# Altium PCB MCH_CLKB_PCB.PcbDoc (part 2 of 5)
Units mil, origin at the board's own origin, x right, y up, seen from the top; angles counter-clockwise.
Board outline 7110.67 x 2894.12 mil, 6 copper layers (Top Layer, GND, MidLayer1, MidLayer2, InternalPlane1, Bottom Layer), stack 61.549 mil thick; 421 components, 433 nets, 2112 pads, 1311 vias.
Unrouted connection lines stored in the file: 39.
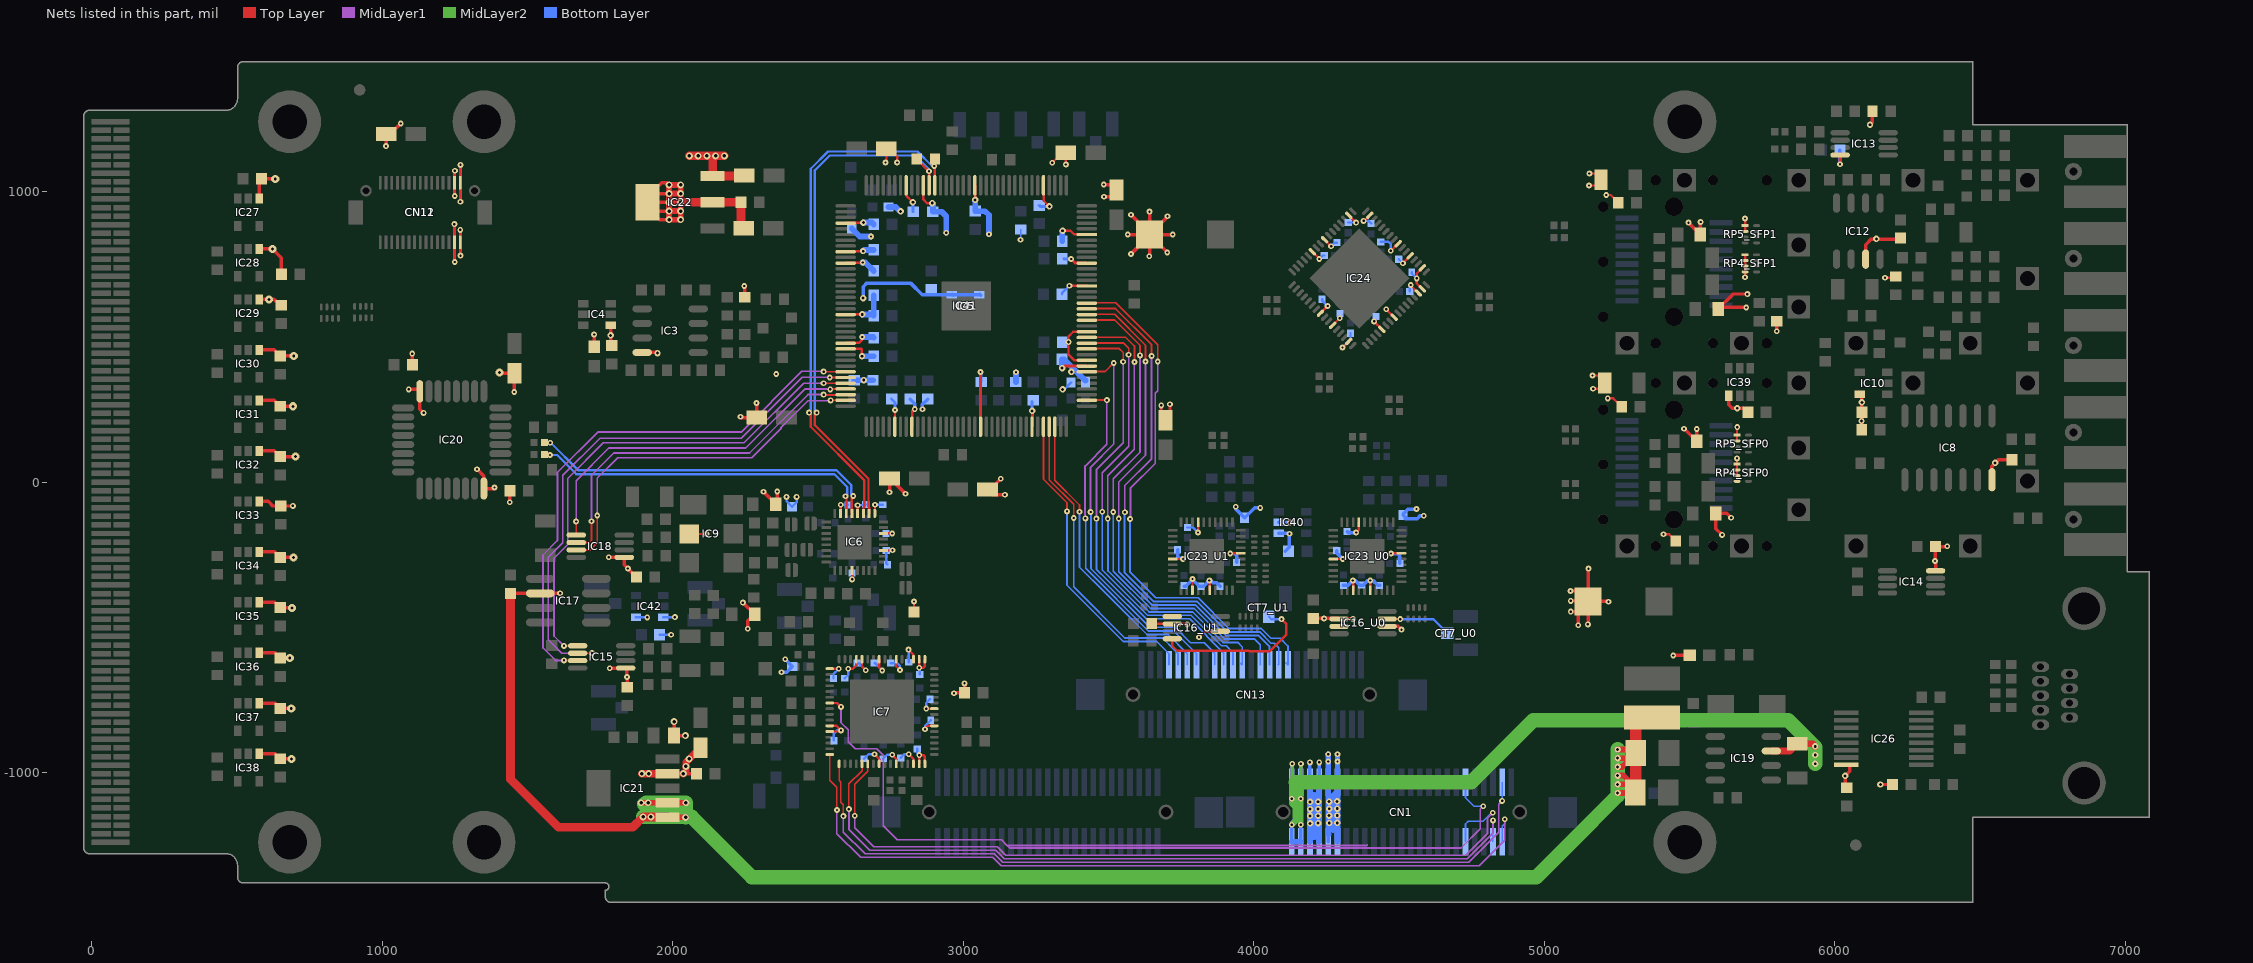
[diagram p6: the nets of this part, all layers, seen from the top]

## Footprints (in the part's own frame and the unit in brackets; to place one, negate y for a bottom-side part, rotate by r counter-clockwise, add the part's x,y. Pads: shape width x height; smd on the part's side, far side on the other; paste and mask are expansions set on the pad) (continued)
SOT-23 [mm] "SOT-23; 3 Leads; Body 3.0 x 2.6 mm, inc. leads (LxW max)"
  rect 0.9x0.95 smd: 1(-0.95,-1.25) 2(0.95,-1.25) 3(0,1.25)
  silkscreen extent -2.07,-1.38 1.3,1.25
SSOP16 [mm] "SSOP; 16 Leads; Body Width 5.3 mm; Pitch 0.65 mm"
  rect 0.4x2.15 smd: 1(-2.275,-3.275) 2(-1.625,-3.275) 3(-0.975,-3.275) 4(-0.325,-3.275) 5(0.325,-3.275) 6(0.975,-3.275) 7(1.625,-3.275) 8(2.275,-3.275) 9(2.275,3.275) 10(1.625,3.275) 11(0.975,3.275) 12(0.325,3.275) 13(-0.325,3.275) 14(-0.975,3.275) 15(-1.625,3.275) 16(-2.275,3.275)
  silkscreen extent -3.25,-3.4 3.25,1.8
TSOP65P490-8AN [mm] "TSOP, 8-Leads, Body 3x3mm, Pitch 0.65mm, IPC Medium Density"
  oval 1.7x0.45 smd: 1(-2.1,0.975) 2(-2.1,0.325) 3(-2.1,-0.325) 4(-2.1,-0.975) 5(2.1,-0.975) 6(2.1,-0.325) 7(2.1,0.325) 8(2.1,0.975)
  silkscreen extent -2.22,-1.55 0.85,1.87, body extent -1.6,-1.6 1.6,1.6, height 1.1
UTCA_MCH_TONGUE2_3_4 [mm] "uTCA MTCA.0 MCH tongue connector"
  rect 3.3x0.48 smd paste-1000: 1(2.35,-31.5) 7(2.35,-27) 10(2.35,-24.75) 13(2.35,-22.5) 16(2.35,-20.25) 19(2.35,-18) 22(2.35,-15.75) 25(2.35,-13.5) 28(2.35,-11.25) 31(2.35,-9) 34(2.35,-6.75) 37(2.35,-4.5) 40(2.35,-2.25) 43(2.35,0) 46(2.35,2.25) 49(2.35,4.5) 52(2.35,6.75) 55(2.35,9) 58(2.35,11.25) 61(2.35,13.5) 64(2.35,15.75) 67(2.35,18) 70(2.35,20.25) 73(2.35,22.5) 76(2.35,24.75) 79(2.35,27) 82(2.35,29.25) 85(2.35,31.5)
  rect 1.4x0.48 smd paste-1000: 2(3.3,-30.75) 3(3.3,-30) 4(3.3,-29.25) 5(3.3,-28.5) 6(3.3,-27.75) 8(3.3,-26.25) 9(3.3,-25.5) 11(3.3,-24) 12(3.3,-23.25) 14(3.3,-21.75) 15(3.3,-21) 17(3.3,-19.5) 18(3.3,-18.75) 20(3.3,-17.25) 21(3.3,-16.5) 23(3.3,-15) 24(3.3,-14.25) 26(3.3,-12.75) 27(3.3,-12) 29(3.3,-10.5) 30(3.3,-9.75) 32(3.3,-8.25) 33(3.3,-7.5) 35(3.3,-6) 36(3.3,-5.25) 38(3.3,-3.75) 39(3.3,-3) 41(3.3,-1.5) 42(3.3,-0.75) 44(3.3,0.75) 45(3.3,1.5) 47(3.3,3) 48(3.3,3.75) 50(3.3,5.25) 51(3.3,6) 53(3.3,7.5) 54(3.3,8.25) 56(3.3,9.75) 57(3.3,10.5) 59(3.3,12) 60(3.3,12.75) 62(3.3,14.25) 63(3.3,15) 65(3.3,16.5) 66(3.3,17.25) 68(3.3,18.75) 69(3.3,19.5) 71(3.3,21) 72(3.3,21.75) 74(3.3,23.25) 75(3.3,24) 77(3.3,25.5) 78(3.3,26.25) 80(3.3,27.75) 81(3.3,28.5) 83(3.3,30) 84(3.3,30.75)
  rect 1.7x0.48 smd paste-1000: 3mate(1.55,-30.75) 3mate(1.55,-30) 3mate(1.55,-29.25) 3mate(1.55,-28.5) 3mate(1.55,-27.75) 3mate(1.55,-26.25) 3mate(1.55,-25.5) 3mate(1.55,-24) 3mate(1.55,-23.25) 3mate(1.55,-21.75) 3mate(1.55,-21) 3mate(1.55,-19.5) 3mate(1.55,-18.75) 3mate(1.55,-17.25) 3mate(1.55,-16.5) 3mate(1.55,-15) 3mate(1.55,-14.25) 3mate(1.55,-12.75) 3mate(1.55,-12) 3mate(1.55,-10.5) 3mate(1.55,-9.75) 3mate(1.55,-8.25) 3mate(1.55,-7.5) 3mate(1.55,-6) 3mate(1.55,-5.25) 3mate(1.55,-3.75) 3mate(1.55,-3) 3mate(1.55,-1.5) 3mate(1.55,-0.75) 3mate(1.55,0.75) 3mate(1.55,1.5) 3mate(1.55,3) 3mate(1.55,3.75) 3mate(1.55,5.25) 3mate(1.55,6) 3mate(1.55,7.5) 3mate(1.55,8.25) 3mate(1.55,9.75) 3mate(1.55,10.5) 3mate(1.55,12) 3mate(1.55,12.75) 3mate(1.55,14.25) 3mate(1.55,15) 3mate(1.55,16.5) 3mate(1.55,17.25) 3mate(1.55,18.75) 3mate(1.55,19.5) 3mate(1.55,21) 3mate(1.55,21.75) 3mate(1.55,23.25) 3mate(1.55,24) 3mate(1.55,25.5) 3mate(1.55,26.25) 3mate(1.55,27.75) 3mate(1.55,28.5) 3mate(1.55,30) 3mate(1.55,30.75)
  rect 1.7x0.48 smd far side paste-1000: 3mate(1.55,-30.75) 3mate(1.55,-30) 3mate(1.55,-29.25) 3mate(1.55,-28.5) 3mate(1.55,-27.75) 3mate(1.55,-26.25) 3mate(1.55,-25.5) 3mate(1.55,-24) 3mate(1.55,-23.25) 3mate(1.55,-21.75) 3mate(1.55,-21) 3mate(1.55,-19.5) 3mate(1.55,-18.75) 3mate(1.55,-17.25) 3mate(1.55,-16.5) 3mate(1.55,-15) 3mate(1.55,-14.25) 3mate(1.55,-12.75) 3mate(1.55,-12) 3mate(1.55,-10.5) 3mate(1.55,-9.75) 3mate(1.55,-8.25) 3mate(1.55,-7.5) 3mate(1.55,-6) 3mate(1.55,-5.25) 3mate(1.55,-3.75) 3mate(1.55,-3) 3mate(1.55,-1.5) 3mate(1.55,-0.75) 3mate(1.55,0.75) 3mate(1.55,1.5) 3mate(1.55,3) 3mate(1.55,3.75) 3mate(1.55,5.25) 3mate(1.55,6) 3mate(1.55,7.5) 3mate(1.55,8.25) 3mate(1.55,9.75) 3mate(1.55,10.5) 3mate(1.55,12) 3mate(1.55,12.75) 3mate(1.55,14.25) 3mate(1.55,15) 3mate(1.55,16.5) 3mate(1.55,17.25) 3mate(1.55,18.75) 3mate(1.55,19.5) 3mate(1.55,21) 3mate(1.55,21.75) 3mate(1.55,23.25) 3mate(1.55,24) 3mate(1.55,25.5) 3mate(1.55,26.25) 3mate(1.55,27.75) 3mate(1.55,28.5) 3mate(1.55,30) 3mate(1.55,30.75)
  rect 3.3x0.48 smd far side paste-1000: 86(2.35,31.5) 89(2.35,29.25) 92(2.35,27) 95(2.35,24.75) 98(2.35,22.5) 101(2.35,20.25) 104(2.35,18) 107(2.35,15.75) 110(2.35,13.5) 113(2.35,11.25) 116(2.35,9) 119(2.35,6.75) 122(2.35,4.5) 125(2.35,2.25) 128(2.35,0) 131(2.35,-2.25) 134(2.35,-4.5) 137(2.35,-6.75) 140(2.35,-9) 143(2.35,-11.25) 146(2.35,-13.5) 149(2.35,-15.75) 152(2.35,-18) 155(2.35,-20.25) 158(2.35,-22.5) 161(2.35,-24.75) 164(2.35,-27) 170(2.35,-31.5)
  rect 1.4x0.48 smd far side paste-1000: 87(3.3,30.75) 88(3.3,30) 90(3.3,28.5) 91(3.3,27.75) 93(3.3,26.25) 94(3.3,25.5) 96(3.3,24) 97(3.3,23.25) 99(3.3,21.75) 100(3.3,21) 102(3.3,19.5) 103(3.3,18.75) 105(3.3,17.25) 106(3.3,16.5) 108(3.3,15) 109(3.3,14.25) 111(3.3,12.75) 112(3.3,12) 114(3.3,10.5) 115(3.3,9.75) 117(3.3,8.25) 118(3.3,7.5) 120(3.3,6) 121(3.3,5.25) 123(3.3,3.75) 124(3.3,3) 126(3.3,1.5) 127(3.3,0.75) 129(3.3,-0.75) 130(3.3,-1.5) 132(3.3,-3) 133(3.3,-3.75) 135(3.3,-5.25) 136(3.3,-6) 138(3.3,-7.5) 139(3.3,-8.25) 141(3.3,-9.75) 142(3.3,-10.5) 144(3.3,-12) 145(3.3,-12.75) 147(3.3,-14.25) 148(3.3,-15) 150(3.3,-16.5) 151(3.3,-17.25) 153(3.3,-18.75) 154(3.3,-19.5) 156(3.3,-21) 157(3.3,-21.75) 159(3.3,-23.25) 160(3.3,-24) 162(3.3,-25.5) 163(3.3,-26.25) 165(3.3,-27.75) 166(3.3,-28.5) 167(3.3,-29.25) 168(3.3,-30) 169(3.3,-30.75)
  rect 1.4x0.48 on Bottom Solder paste-1000: 138(3.3,-7.5)
VCTCXO_VM53S [mm]
  rect 1.2x1.2 smd: 1(-0.6,0.6) 2(3.6,0.6) 3(3.6,3.2) 4(-0.6,3.2)
  silkscreen extent -1.6,-0.4 4.6,4.2
vs-705 [mm]
  rect 1.68x2.34 smd: 1(-0.025,1.168)
  rect 1.68x1.7 smd: 2(2.54,0.838) 3(5.055,0.838) 4(5.055,4.674) 5(2.515,4.674) 6(-0.025,4.674)
  silkscreen extent -1.65,0.46 6.71,4.98
YC124 [mm]
  rect 0.6x0.25 smd: 1(-0.5,0.75)
  oval 0.6x0.25 smd: 2(-0.5,0.25) 3(-0.5,-0.25) 4(-0.5,-0.75) 5(0.5,-0.75) 6(0.5,-0.25) 7(0.5,0.25) 8(0.5,0.75)
  silkscreen extent -0.75,-1 0.75,1

## Part data
C1 C2: library part CC0402_22NF_16V_10%_X7R, "Non-polarised capacitor"
C3 C4 C13 C15 C16 C17 C23 C24 C25 C27 C28 C29 C31 C32 C33 C34 C35 C36 C56 C58 C64 C65 C70 C72 C73 C74 C76 C81 C84 C86 C87 C90 C98 C99 C100 C103 C118_SFP0 C118_SFP1 C121_SFP0 C121_SFP1 C123_SFP0 C123_SFP1 C124 C129_U0 C129_U1 C134_U0 C134_U1 C136 C137 C138 C139 C140 C141 C142 C143 C144 C145 C146 C148 C149 C150 C151 C152 C153 C154 C155 C156 C157 C164 C167: library part CC0603_100NF_50V_10%_X7R, "Non-polarised capacitor"
C7 C8 C9 C10 C11 C12: library part Cap, "Capacitor"
C14 C18 C26 C30 C37 C38 C39 C40 C46 C85 C94 C96 C107 C108 C110 C112 C126 C135_U0 C135_U1: library part CC0603_10NF_50V_10%_X7R, "Non-polarised capacitor"
C19 C20 C21 C22 C57 C71 C109 C111 C113 C115 C147 C168: library part CTE3216-18_22UF_10V_10%, "Polarised capacitor"
C41 C42 C43 C44 C45 C47 C49 C50 C52 C53 C54 C59 C61 C63 C66 C67 C68 C69 C77 C79 C80 C83 C92 C104 C105 C128_U0 C128_U1 C132_U0 C132_U1 C133_U0 C133_U1 C158_U0 C158_U1 C163_U0 C163_U1 C165 C166 C178 C188 C189 C190 C191 C192 C193 C194 C195 C196 C197 C200 C201 C202: library part CC0402_100NF_16V_10%_X7R, "Non-polarised capacitor"
C48 C51 C88 C95 C97 C102: library part CC0603_10UF_6.3V_20%_X5R, "Non-polarised capacitor"
C55 C75 C91 C93 C101 C117_SFP0 C117_SFP1 C120_SFP0 C120_SFP1 C122_SFP0 C122_SFP1: library part CC1206_10UF_10V_10%_X7R, "Non-polarised capacitor"
C60 C62 C78 C82: library part CC0603_47NF_25V_10%_X7R, "Non-polarised capacitor"
C89: library part CC0402_1NF_50V_10%_X7R, "Non-polarised capacitor"
C106: library part CC0805_2.2UF_16V_10%_X7R, "Non-polarised capacitor"
C116: library part CC1206_10UF_16V_10%_X7R, "Non-polarised capacitor"
C119 C125: library part CTE3528-21_47UF_6.3V_10%_LESR0250, "Polarised capacitor"
C127: library part CC0603_68PF_50V_5%_NP0, "Non-polarised capacitor"
C130_U0 C130_U1 C131_U0 C131_U1 C159_U0 C159_U1 C169 C170 C171 C172 C173 C174 C175 C176 C177 C179 C180 C181 C182 C183 C184 C185 C186 C187: library part CC0402_10NF_16V_10%_X7R, "Non-polarised capacitor"
C160 C162: library part CC0603_220NF_16V_+80%-20%_Y5V, "Non-polarised capacitor"
C161: library part CC0603_33PF_50V_5%_NP0, "Non-polarised capacitor"
C198 C199: library part CTE7343-43_220UF_10V_10%_LESR0050, "Polarised capacitor"
CN1 CN3 CN13: library part KX14_50p, "multipin B2B connector (plug)"
CN2 CN4 CN5 CN6 CN7: library part SMA_SOCKET, "SMB piggyboard connection"
CN8_SFP0 CN8_SFP1: library part SFP_SOCKET_SINGLE, "Socket for SFP module"
CN9: library part CON_DB9_H, "Receptacle Assembly, 9 Position, Right Angle"
CN10: "microTCA MTCA.0 standard MCH connector 3"
CN11: library part KX14_30p, "multipin B2B connector (plug)"
CN12: library part KX15_30p, "multipin B2B connector (plug)"
CT1 CT2 CT3 CT4 CT5 CT6 CT7_U0 CT7_U1 CT8 CT9 CT10: library part CON_TESTPOINT_UFL, "UFL connector testpoint"
D2: library part BAV99, "Silicon Switching Diode Array for High-Speed Switching"
D3 D4: "Silicon Switching Diode Array for High-Speed Switching"
D5: "Red chip LED"
D6: library part "D Schottky", "Schottky Diode"
IC3: library part AD8052, "Low Cost, High-Speed Rail-to-Rail Amplifier"
IC4: library part ADS7886, "TI 1 MSPS serial ADC"
IC5: "Cyclone III Family FPGA, 94 I/O Pins, 4 PLLs, 144-Pin EQFP, Speed Grade 7, Commercial Grade"
IC6: "PLL generator with 1:4 fanout"
IC7: "PLL with clock fanout"
IC8: "Quad Buffer with 3-State Outputs with TTL Compatible Inputs"
IC9: library part VCXO_CFPV_45, "VCXO oscillator"
IC10: "Analog Devices fast comparator"
IC11: library part VCTCXO_VM53S, "VCTCXO oscillator"
IC12: "Analog Devices general purpose low-voltage R2R CMOS opamp"
IC13: "ONSemi differental receiver w/ECL output"
IC14: "ONSemi LVDS/LVPECL -> LVTTL/LVCMOS buffer"
IC15 IC18: library part AD5662, "Analog Devices 16-bit DAC w/SPI interface, ext ref"
IC16_U0 IC16_U1: "1:4 LVTTL fanout"
IC17: "2.5V/3.0V High-Precision Reference"
IC19: "Step-down switchmode converter"
IC20: "TI LVDS 1:10 fanout"
IC21: library part TPS786xx, "TI low noise LDO, 1A load"
IC22: library part 1117, "Three-Terminal Adjustable Output Positive Voltage Regulator"
IC23_U0 IC23_U1: "Texas Instruments Gigabit Ethernet PHY with deterministic clocking and LVPECL output interface"
IC24: "Gigabit 8x8 crosspoint switch"
IC26: library part IFC_MAX3232
IC27 IC29 IC31 IC33 IC35 IC37: "TTL->LVDS buffer"
IC28 IC30 IC32 IC34 IC36 IC38: "LVDS->TTL buffer"
IC39 IC40 IC41 IC42: "I2C temp. sensor"
L1 L2 L3 L4 L5 L6 L7 L11 L12 L13 L14 L15: library part Inductor
L8_SFP0 L8_SFP1 L9_SFP0 L9_SFP1 L10_U0 L10_U1: "Ferrite bead"
L16: library part L_WUERTH_744043, "Wuerth small footprint SMD power inductor"
R1 R2 R32 R46 R53_U0 R53_U1 R54_U0 R54_U1: library part R0603_49R9_0.1%_0.063W_10PPM, "Resistor - 0.1%"
R3 R17 R20 R21 R48 R51 R59 R70_SFP0 R70_SFP1 R71_SFP0 R71_SFP1 R95: library part R0603_0R_JUMPER, "Resistor - 1%"
R8 R9 R10 R11 R12 R13 R14: library part Res2, "Resistor"
R15 R16 R23 R24 R28 R29 R37 R38 R62: library part R0603_10K_1%_0.1W_100PPM, "Resistor - 1%"
R18 R19 R33 R34 R41 R42 R47 R49 R55 R73 R74 R75 R76 R77 R78: library part R0603_100R_1%_0.1W_100PPM, "Resistor - 1%"
R22 R35 R36 R43 R57 R58 R65: library part R0603_22R_1%_0.1W_100PPM, "Resistor - 1%"
R25 R27: library part R0603_2K2_1%_0.1W_100PPM, "Resistor - 1%"
R26: library part R0603_33R_1%_0.1W_100PPM, "Resistor - 1%"
R30 R31 R40 R45 R52: library part R0603_470R_1%_0.1W_100PPM, "Resistor - 1%"
R39: library part R0603_100K_1%_0.1W_100PPM, "Resistor - 1%"
R44: library part R0603_100R_0.1%_0.063W_10PPM, "Resistor - 0.1%"
R50: library part R0603_5K1_1%_0.1W_100PPM, "Resistor - 1%"
R56: library part R0603_270R_1%_0.1W_100PPM, "Resistor - 1%"
R60 R61 R83 R84: library part R0603_200R_0.1%_0.063W_10PPM, "Resistor - 0.1%"
R63: library part R0603_4K12_0.1%_0.063W_10PPM, "Resistor - 0.1%"
R64: library part R0603_3K24_0.1%_0.063W_10PPM, "Resistor - 0.1%"
R66: library part R0603_820R_1%_0.1W_100PPM, "Resistor - 1%"
R67: library part R0603_390R_1%_0.1W_100PPM, "Resistor - 1%"
R69 R72 R79 R80 R81 R82 R85 R86 R87 R88 R89 R90 R91 R92 R93 R94 R96 R97: library part R0402_0R_JUMPER, "Resistor - 1%"
RP1_U0 RP1_U1 RP2_U0 RP2_U1 RP3_U0 RP3_U1 RP6 RP7: library part Res_Pack4_22R_YC124, "4-resistor pack"
RP4_SFP0 RP4_SFP1 RP5_SFP0 RP5_SFP1: library part Res_Pack4_10k_YC124, "4-resistor pack"
SJ1 SJ2 SJ3 SJ4 SJ7: library part SOLDER_JOINT_NORM_OPEN
SJ5 SJ6: library part SOLDER_JOINT_NORM_CLOSED

## Free pads (board coordinates)
  round 39.37 smd paste-39.37 mask+19.68: fid_1(922.5,1350) fid_1(6072.5,-1250)
  round 39.37 smd far side paste-39.37 mask+19.68: fid_4(922.5,1350) fid_4(6072.5,-1250)
  round 216.54 hole 118.11: ""(681.16,-1240.16) ""(681.16,1240.16) ""(1350.45,-1240.16) ""(1350.45,1240.16) ""(5484.31,-1240.16) ""(5484.31,1240.16)

## Via types
v1: diameter 20, hole 8, Top Layer to Bottom Layer, tented both sides, 842 vias
v2: diameter 22, hole 10, Top Layer to Bottom Layer, tented both sides, 199 vias
v3: diameter 24, hole 12, Top Layer to Bottom Layer, tented both sides, 163 vias
v4: diameter 25.98, hole 12.99, Top Layer to Bottom Layer, tented both sides, 58 vias
v5: diameter 20, hole 10, Top Layer to Bottom Layer, tented both sides, 18 vias
v6: diameter 20, hole 10, Top Layer to Bottom Layer, 16 vias
v7: diameter 28, hole 10, Top Layer to Bottom Layer, tented both sides, 15 vias

## Nets (pads, with @x,y where several pads share a name; then routed paths per layer and width w, separated by ;. In a path a pad name is that pad's centre, name@x,y a point inside that pad or via, vN(x,y) a via of type N, cw(c..) or ccw(c..) an arc to the next point about the centre after c; other vN are vias at no path point)
+1V2: C13.1 C14.2 C17.1 C18.2 C25.1 C26.2 C29.1 C30.2 C57.1 C71.1 C112.2 C113.1 C115.1 IC5.5 IC5.29 IC5.45 IC5.61 IC5.78 IC5.102 IC5.116 IC5.134 IC22.2 IC22.4 L3.1 L4.1 | length 2660.9
  Top Layer w8: IC5.61@2596.15,479.05 2641.55,479.05 2651.5,489 v1@2651.5,499 ; IC5.45@2596.15,794.01 2654.51,794.01 v1(2655.5,795) ; v1(2732.5,1100) 2735.68,1103.18 C115.1@2735.68,1147 ; C115.1@2745.5,1147 2772.5,1120 v1(2772.5,1100) ; IC5.78@2765.44,191.65 2765.44,236 v1(2765.44,248.06) ; IC5.29@2804.81,1022.35 2804.81,984.69 v2(2826.5,963) ; IC5.5@3277.25,1022.35 3277.25,968.25 v2(3296.5,949) ; v1(3306.5,1099) 3341.5,1134 C57.1@3353.32,1134 3353.32,1093.18 v1(3353.5,1093)
  Top Layer w10: v2(3237.5,245) 3237.88,244.62 IC5.102@3237.88,191.65 ; v2(3340.5,392) 3347.81,399.31 IC5.116@3425.85,399.31 ; v1(3371.5,768) 3385.86,753.64 IC5.134@3425.85,753.64
  Top Layer w12: IC22.4@1913.3,939.2 IC22.4@1913.3,963 ; v3(1987.5,903) 1962.5,903 1955.5,903 1913.3,945.2 IC22.4@1913.3,963 ; v3(1987.5,933) 1943.3,933 IC22.4@1913.3,963 ; v3(1987.5,963) IC22.4@1913.3,963 ; v3(1987.5,993) 1943.3,993 IC22.4@1913.3,963 ; v3(1987.5,1023) 1980.5,1030 1962.5,1030 1913.3,980.8 IC22.4@1913.3,963 ; v1(3483.5,1024) 3508.68,1024 C113.1@3527.5,1005.18 3504.32,982 v1(3484.5,982)
  Top Layer w20: v3(1987.5,933) 2024.5,933 v3@2027.5,930 ; v3(1987.5,963) v3@2024.5,963 ; v3(1987.5,993) 2024.5,993 v3@2027.5,990 ; v3@2027.5,960 v3@2024.5,963 ; IC22.2@2137.7,963 v3@2024.5,963 ; v2(3372.42,379.28) v2@3373.15,379.28 ; v3(1987.5,903) v3(1987.5,1023) v3(2027.5,1023) v3(2027.5,903) v3(1987.5,903)
  Top Layer w30: v3@2024.5,963 IC22.2@2137.7,963 C112.2@2235,963 2235,883.32 C71.1@2244.32,874
  Bottom Layer w10: C13.1@2753.5,285.5 2765.44,273.57 v1(2765.44,248.06) ; v2(2826.5,963) 2827.5,962 C14.2@2827.5,930.5 ; v2(3237.5,245) C17.1@3237.5,277.5 ; C26.2@3261.5,952.5 3265,949 v2(3296.5,949) ; C18.2@3346.5,769 3347.5,768 v1(3371.5,768)
  Bottom Layer w20: v1@2651.5,499 2690,499 C30.2@2692,497 ; v1(2655.5,795) 2659.5,799 C25.1@2692,799 ; L3.1@2743.06,947 2767.5,947 2782.5,932 v2(2784.5,932) ; v2(3340.5,392) 3340,392.5 C29.1@3340,422 3348.15,422 3377.33,392.83 ; v2(3372.42,379.28) 3377.33,384.18 3377.33,392.83 ; L4.1@3420.5,349.65 3377.33,392.83
  other v1: 2652.5,499
  other v3: 2027.5,933 2027.5,963 2027.5,993
+2V5: C15.1 C19.1 C20.1 C23.1 C27.1 C31.1 C33.1 C35.1 C36.1 C128_U0.2 C128_U1.2 C129_U0.2 C129_U1.2 C130_U0.2 C130_U1.2 C131_U0.2 C131_U1.2 C132_U0.2 C132_U1.2 C133_U0.2 C133_U1.2 C145.1 C146.1 C147.1 C158_U0.2 C158_U1.2 C198.1 CN1.9 CN1.10 CN1.11 CN1.12 IC5.17 IC5.26 IC5.40 IC5.47 IC5.93 IC5.117 IC5.122 IC5.130 IC5.139 IC16_U0.2 IC16_U0.6 IC16_U1.2 IC16_U1.6 IC20.16 IC20.32 IC23_U0.6 IC23_U0.13 IC23_U0.16 IC23_U0.26 IC23_U0.37 IC23_U1.6 IC23_U1.13 IC23_U1.16 IC23_U1.26 IC23_U1.37 L1.1 L2.1 L10_U0.2 L10_U1.2 R20.1 R23.1 R24.2 | length 5888.4
  Top Layer w8: IC5.47@2596.15,754.64 2652.14,754.64 v1@2653.5,756 ; IC5.40@2596.15,892.43 2655.93,892.43 v2(2656.5,893) ; IC5.26@2862.86,1022.35 2862.86,972.64 2875.5,960 v2(2893.5,960) ; v2(3041.03,971.47) IC5.17@3041.03,1022.35 ; v2@3335.5,319 v2(3342.5,319) ; v2(3342.5,865) 3369.5,865 3381.44,853.06 IC5.139@3426.85,853.06 ; v1(3365.5,676) 3365.6,675.9 3386.5,675.9 ; 3377.6,675.9 3386.5,675.9 ; 3381.51,419.99 3376,425.5 ; IC5.117@3425.85,418.99 3382.51,418.99 3376,425.5 ; IC5.122@3425.85,517.42 3378.92,517.42 3362.5,501 v2(3362.5,482) 3362.5,439 3376,425.5 ; IC5.130@3426.85,675.9 3425.85,675.9 3386.5,675.9 ; C129_U1.2@3649,-487 3650.2,-488.2 IC16_U1.6@3719.82,-488.2 3766.7,-488.2 v1@3770.5,-492 ; IC23_U1.6@3721.23,-264.98 v1(3756.5,-265) ; IC23_U1.13@3789.15,-372.27 v1@3789.15,-336.65 ; v1(3808.5,-174) 3808.83,-173.67 IC23_U1.37@3808.83,-138.02 ; v1(3811.5,-534) 3831.7,-513.8 IC16_U1.2@3885.18,-513.8 3842.5,-513.8 ; v1(3847.5,-339) 3848.2,-339.7 IC23_U1.16@3848.2,-372.27 ; v1(3919.5,-246) 3920.2,-245.3 IC23_U1.26@3955.48,-245.3 ; IC23_U0.6@4274.23,-264.98 v1(4306.5,-265) ; v1(4341.5,-339) 4342.15,-339.65 IC23_U0.13@4342.15,-372.27 ; v1(4352.5,-174) 4361.83,-164.67 IC23_U0.37@4361.83,-138.02 ; IC23_U0.16@4401.2,-372.27 4401.2,-339.3 v1(4401.5,-339) ; v1@4473.2,-245.3 IC23_U0.26@4508.48,-245.3
  Top Layer w10: v1(3059.5,379) 3059.71,378.79 IC5.93@3059.71,191.65 ; v1(3681.5,264) 3680.5,263 3680.5,236 3696.5,220 C20.1@3696.5,213.18 3696.5,215 3711.5,230 v1(3711.5,268)
  Top Layer w12: v1(1091.5,319) 1122.59,319 IC20.16@1129.26,312.32 1129.26,251.24 v1(1142.5,238) ; v1(1103.5,442) 1104,441.5 C145.1@1104,404 ; v1(1326.5,44) 1349.74,20.76 IC20.32@1349.74,-22.32 1383.18,-22.32 v1(1386.5,-19) ; v7(1404.24,376.56) 1406.37,374.43 C147.1@1455.15,374.43 1455.15,310.45 v1(1454.8,310.1) ; v1(1439.1,-69.4) 1439.5,-69 C146.1@1439.5,-30 ; v1(3129.5,11) 3092.5,-26 C19.1@3083.68,-26 3101.68,-44 v1(3143.5,-44) ; v1(3566.5,852) C198.1@3641.45,852 ; v1(3577.5,785) 3641.45,848.95 C198.1@3641.45,852 ; v1(3577.5,920) C198.1@3641.45,856.05 ; v1(3640.5,777) 3641.45,777.95 C198.1@3641.45,852 ; v1(3641.5,931) v1(3641.5,931) C198.1@3641.45,856.05 ; v1(3702.5,790) 3702.5,790.95 C198.1@3641.45,852 ; v1(3703.5,915) 3703.5,914.05 C198.1@3641.45,852 ; v1(3721.5,852) C198.1@3641.45,852 ; C129_U0.2@4204.5,-469.5 v1@4248.5,-469.5 ; v1(4242.5,-469.5) v1@4248.5,-469.5 ; v1(4341.5,-471) 4341.3,-471.2 IC16_U0.6@4293.82,-471.2 4292.11,-469.5 v1@4248.5,-469.5 ; IC16_U0.2@4459.18,-496.8 4497.3,-496.8 v1(4508.5,-508) ; C198.1@3641.45,852 C198.1@3641.45,856.05
  Bottom Layer w5: v1(3197.5,834) R24.2@3197.5,869.5
  Bottom Layer w8: v2@3041.03,968 v2(3041.03,971.47) ; C33.1@3340,646 3340,650.5 v1(3365.5,676) ; v2(3342.5,319) 3347.94,319 L2.1@3371.5,342.56 ; C158_U1.2@3771.5,-156.28 3790.78,-156.28 v1(3808.5,-174)
  Bottom Layer w10: v1(3059.5,379) 3061.5,377 R23.1@3061.5,344.5
  Bottom Layer w12: C131_U1.2@3737.78,-233 3737.78,-259.28 3741.5,-263 3754.5,-263 v1(3756.5,-265) ; C128_U1.2@3760.5,-358.72 3766.45,-358.72 v1@3788.5,-336.66 ; v1(3789.5,-334) 3788.5,-335 v1@3788.5,-336.66 ; C132_U1.2@3884.5,-358.72 3873.27,-347.49 3860.3,-347.49 3851.81,-339 v1(3847.5,-339) 3827.78,-358.72 C133_U1.2@3818.5,-358.72 3812.55,-358.72 3790.5,-336.66 v1@3788.5,-336.66 ; v1(3919.5,-246) 3933.5,-246 3941.22,-253.72 C130_U1.2@3941.22,-277 ; v1(3938.5,-85) 3938.5,-92.69 L10_U1.2@3968.5,-122.69 3969.69,-122.69 4003.39,-89 v1(4022.5,-89) ; v2@4255.5,-1097 4256.75,-1095.75 CN1.9@4256.75,-1033.86 ; v2@4256.5,-1176 4256.75,-1176.25 CN1.10@4256.75,-1238.58 4256.75,-1162.38 ; v1(4256.5,-962) 4256.75,-962.25 CN1.9@4256.75,-1033.86 ; v1(4256.5,-937) 4256.75,-937.25 CN1.9@4256.75,-1033.86 ; v2@4259.32,-1093.06 v2@4259.58,-1092.8 ; v2@4259.58,-1177.8 v2@4260.32,-1177.06 ; C128_U0.2@4285.78,-236 4285.78,-244.28 v1(4306.5,-265) ; v2@4287.5,-1099 4288.25,-1098.25 CN1.11@4288.25,-1033.86 ; CN1.12@4288.25,-1238.58 4288.25,-1176.25 v2@4288.5,-1176 ; v1(4288.5,-962) 4288.25,-962.25 CN1.11@4288.25,-1033.86 ; v1(4288.5,-937) 4288.25,-937.25 CN1.11@4288.25,-1033.86 ; v2@4291.07,-1176.3 v2@4291.32,-1176.06 ; v2@4291.07,-1095.82 v2@4291.32,-1096.06 ; C132_U0.2@4308.5,-355.72 4324.78,-355.72 v1(4341.5,-339) 4349.84,-339 4365.55,-354.72 C131_U0.2@4371.5,-354.72 4377.45,-354.72 4393.16,-339 v1(4401.5,-339) 4410.84,-339 4427.55,-355.72 C158_U0.2@4433.5,-355.72 ; C133_U0.2@4321.5,-170.28 4325.22,-174 v1(4352.5,-174) ; v1(4472.5,-246) 4473.5,-247 4495.5,-247 4503.22,-254.72 C130_U0.2@4503.22,-280 ; v1(4560.5,-93) 4531.5,-93 4514.5,-110 L10_U0.2@4514.5,-113.69 4522.5,-121.69 4522.5,-126 4562.39,-126 4572.39,-116 v1(4585.5,-116)
  Bottom Layer w18: v1(4256.5,-937) 4256.75,-937.25 CN1.9@4256.75,-1033.86 ; CN1.11@4288.25,-1033.86 4288.5,-1033.61 v1(4288.5,-937)
  Bottom Layer w20: L1.1@2616.5,872.44 2643.94,845 v1(2682.5,845) ; v1@2653.5,756 2663,756 C31.1@2692,727 ; v2(2656.5,893) 2686,893 C15.1@2692,887 ; v2(2893.5,960) 2895.5,958 C35.1@2895.5,930.5 2926,930.5 2941.5,915 v1(2941.5,858) ; v2@3041.03,968 3041.5,967.53 C36.1@3041.5,932.5 3075,932.5 3088.5,919 v1(3088.5,853) ; R20.1@3181.5,344.5 v1(3181.5,378) ; C27.1@3341,829 3341,863.5 v2(3342.5,865) ; 4256.75,-1162.38 4256.75,-1211.72 CN1.10@4257.55,-1212.52 ; CN1.9@4256.75,-1033.86 4256.75,-1182.57 4272.6,-1198.42 4272.6,-1079.95 4288.25,-1064.3 CN1.12@4288.25,-1238.58
  other v1: 3771.5,-490 2654.5,756
  other v2: 4259.96,-1173.83 4287.73,-1173.47 4259.78,-1148.17 4287.56,-1147.82 4259.96,-1124.82 4287.73,-1124.47 4259.43,-1100.23 4287.38,-1099.52
+3V3: C7.1 C8.1 C16.2 C21.1 C22.1 C24.2 C28.2 C32.2 C34.2 C41.1 C42.1 C43.1 C44.1 C46.1 C50.1 C51.1 C58.2 C65.2 C70.1 C72.2 C73.2 C111.1 C122_SFP0.2 C122_SFP1.2 C123_SFP0.2 C123_SFP1.2 C136.2 C137.2 C141.1 C142.1 C143.1 C144.1 C148.1 C149.1 C150.1 C151.1 C152.1 C153.1 C154.2 C155.2 C156.2 C157.2 C164.1 C167.1 C168.1 C178.2 C188.1 C189.1 C190.1 C191.1 C192.1 C193.1 C194.1 C195.1 C196.1 C197.1 C199.1 C200.2 C201.2 C202.2 CN1.5 CN1.6 CN1.7 CN1.8 CN11.1 CN11.2 CN11.3 CN11.4 CN12.1 CN12.2 CN12.3 CN12.4 D5.1 IC3.8 IC4.1 IC5.56 IC5.62 IC5.81 IC6.1 IC6.4 IC6.7 IC6.20 IC6.27 IC6.30 IC8.14 IC10.5 IC12.7 IC13.8 IC14.8 IC22.3 IC24.5 IC24.8 IC24.14 IC24.15 IC24.18 IC24.21 IC24.24 IC24.31 IC24.34 IC24.40 IC24.43 IC24.56 IC24.59 IC24.63 IC26.16 IC27.1 IC28.1 IC29.1 IC30.1 IC31.1 IC32.1 IC33.1 IC34.1 IC35.1 IC36.1 IC37.1 IC38.1 IC39.4 IC40.4 IC40.5 IC41.3 IC41.4 IC42.3 IC42.4 L7.2 L8_SFP0.2 L8_SFP1.2 L9_SFP0.2 L9_SFP1.2 R9.2 R15.2 R16.2 R25.2 R39.2 R71_SFP0.1 R71_SFP1.1 RP4_SFP0.1 RP4_SFP0.2 RP4_SFP0.3 RP4_SFP0.4 RP4_SFP1.1 RP4_SFP1.2 RP4_SFP1.3 RP4_SFP1.4 RP5_SFP0.1 RP5_SFP0.2 RP5_SFP1.1 RP5_SFP1.2 | length 9674.3
  Top Layer w8: v1(1248.4,887.9) 1249.11,887.19 CN12.4@1249.11,825.64 1249.11,757.59 v1(1249.5,757.2) ; v1(1249.6,984.8) 1249.11,985.29 CN12.3@1249.11,1030.36 1249.11,1070.41 v1(1250,1071.3) ; v1(1268.7,868) 1268.8,867.9 CN12.2@1268.8,825.64 1268.8,780.3 v1(1269.6,779.5) ; v1(1269,965.1) 1268.8,965.3 CN12.1@1268.8,1030.36 1268.8,1091.2 v1(1269.5,1091.9) ; IC6.7@2578.15,-107.75 v1@2578.15,-78.35 ; IC5.62@2596.15,459.36 2648.14,459.36 2650.5,457 2650.5,434 v2(2651.5,433) ; IC5.56@2596.15,577.47 2652.03,577.47 v2(2652.5,577) ; v1(2617.5,-335) IC6.20@2617.52,-304.6 ; v1(2636.5,-80) 2637.5,-80 2637.2,-80.3 IC6.4@2637.2,-107.75 ; IC6.1@2696.26,-107.75 2696.26,-78.24 v1(2696.5,-78) ; IC6.27@2725.78,-235.7 2755.8,-235.7 v1(2756.5,-235) ; IC6.30@2725.78,-176.65 2755.15,-176.65 v1(2755.5,-177) ; IC5.81@2823.49,191.65 2823.49,240.99 ; 2823.49,245.01 2823.49,240.99 ; IC5.81@2824.49,191.65 2824.49,241.99 ; 2824.49,244.01 2824.49,241.99 ; C51.1@2830.5,-447.5 v1(2830.5,-411) ; v1(2833.5,251) 2824.49,241.99 ; IC24.43@4202.03,792.87 4225.5,769.4 v1(4225.5,768) ; IC24.56@4229.87,581.29 4254.5,605.92 v1(4254.5,606) ; IC24.40@4243.79,834.63 4266.42,812 v1(4266.5,812) ; IC24.59@4271.63,539.53 4296.1,564 v1(4296.5,564) ; v1(4305.5,463) 4306.45,463 IC24.63@4327.31,483.86 ; IC24.34@4327.31,918.14 v1(4352.5,893) ; v1(4378.5,899) 4380.55,899 IC24.31@4399.69,918.14 ; v1(4414.5,553) 4414.5,552.56 IC24.5@4441.45,525.62 ; v1(4456.5,595) 4456.5,594.08 IC24.8@4483.21,567.37 ; v1@4471.5,795 v1@4471.5,795.08 ; v1(4471.5,796) v1@4471.5,795.08 ; IC24.24@4497.13,820.71 4471.96,795.54 v1@4471.5,795.08 ; v1(4513.5,753) 4513.5,753.56 IC24.21@4538.88,778.95 ; v1(4540.5,678) 4540.5,677.11 IC24.14@4566.72,650.89 ; IC24.15@4580.64,664.81 4561.5,683.95 v1(4561.5,701) 4561.5,718.05 IC24.18@4580.64,737.19 ; v1(5154.5,1021) 5175.44,1021 C122_SFP1.2@5195.44,1041 5174.44,1062 v1(5155.5,1062) ; v1(5166.5,367) 5182.44,367 C122_SFP0.2@5208.44,341 5208.44,330.94 5198.5,321 v1(5168.5,321) ; v1(5213.5,988) 5229,988 C123_SFP1.2@5255,962 ; v1(5218.5,288) 5238,288 C123_SFP0.2@5267,259 ; v1(5410.5,-180) 5430,-180 R71_SFP0.1@5453,-203 ; RP4_SFP0.4@5663.81,2.47 RP4_SFP0.3@5663.81,22.16 RP4_SFP0.2@5663.81,41.84 RP4_SFP0.1@5663.81,61.53 5663.81,81.51 v1(5663.85,81.55) ; RP5_SFP0.2@5663.81,141.84 5663.81,188.32 v1(5664.5,189) ; v1(5691.5,705) 5691.81,705.32 RP4_SFP1.1@5691.81,782.53 ; v1(5691.5,907) 5691.81,906.68 RP5_SFP1.2@5691.81,862.84 ; v1(6173.5,703) 6205,703 R25.2@6209.5,707.5 ; 2823.49,240.99 2824.49,241.99
  Top Layer w12: IC38.1@576.9,-935.76 631.75,-935.76 C148.1@648.5,-952.5 687.5,-952.5 v7(688.29,-953.3) ; IC37.1@576.9,-761.94 631.27,-761.94 C150.1@648.5,-779.17 v7(686.68,-779.17) ; IC36.1@576.9,-588.12 630.78,-588.12 C149.1@648.5,-605.84 680.9,-605.84 v7(681.55,-605.19) ; IC35.1@576.9,-414.3 630.3,-414.3 649.16,-433.17 v7(688.97,-433.17) ; IC34.1@576.9,-240.48 629.81,-240.48 C151.1@648.5,-259.17 693.07,-259.17 v7(694.03,-260.13) ; IC33.1@576.9,-66.67 607.17,-66.67 623,-82.5 C167.1@650.5,-82.5 692,-82.5 v1(692.5,-82) ; IC32.1@576.9,107.15 628.84,107.15 C143.1@648.5,87.5 v7(701.59,87.5) ; IC31.1@576.9,280.97 628.36,280.97 C152.1@648.5,260.83 693.2,260.83 v7(693.35,260.68) ; IC30.1@576.9,454.79 627.87,454.79 C153.1@648.5,434.16 695.14,434.16 v7(695.38,434.4) ; IC29.1@576.9,628.61 627.39,628.61 ; IC28.1@576.9,802.43 v7(622.07,802.43) 653,771.5 C142.1@653,716 ; IC27.1@576.9,976.24 576.9,1036.91 C141.1@584,1044 631.04,1044 v7(631.69,1043.34) ; v7@609.5,628.61 627.39,628.61 ; v1(1012.7,1156.4) 1013.52,1157.22 C168.1@1013.52,1198.4 1027.7,1198.4 v1(1063.7,1234.4) ; C8.1@1729.5,465.46 v1(1729.5,508) ; IC4.1@1786.74,539.6 1786.74,471.25 C7.1@1792.5,465.5 ; IC3.8@1895.04,446 1945.5,446 v2(1947.5,444) ; v1(2233.5,225) 2236.5,222 C111.1@2289.32,222 2289.32,271.18 v1(2288.5,272) ; C22.1@2746.32,12 2746.32,-34.82 v1(2746.5,-35) ; C22.1@2749,12 v1(2801.4,-40.4) ; v1(5090.5,-375) 5115.45,-375 C199.1@5151.45,-411 ; v1(5091.5,-446) C199.1@5116.45,-446 ; v1(5091.5,-409) 5149.45,-409 C199.1@5151.45,-411 ; v1(5117.5,-493) 5116.45,-491.95 C199.1@5116.45,-446 ; v1(5150.5,-490) 5151.45,-489.05 C199.1@5151.45,-411 ; v1(5152.5,-298) 5151.45,-299.05 C199.1@5151.45,-411 ; v1(5221.5,-412) 5220.5,-411 C199.1@5151.45,-411 ; v1(5444.5,-597) 5445.5,-596 D5.1@5501.04,-596 ; v1(5481.5,183.37) L8_SFP0.2@5524.87,140 v1(5524.87,182.37) ; v1(5496.5,893) 5496.87,893 L8_SFP1.2@5537.87,852 5537.87,894.37 v1(5538.5,895) ; v1(5612.5,-182) 5590.87,-160.37 L9_SFP0.2@5590.87,-108 5628.5,-108 v1(5643.5,-123) ; IC39.4@5635.1,296.76 5635.1,266.4 5647.5,254 v2(5664.5,254) 5687,254 C157.2@5701,240 ; v1(5695.5,601) 5647.5,601 5603.87,601 L9_SFP1.2@5598.87,596 5650.18,647.31 5699.19,647.31 v1(5699.5,647) ; v1(5800.5,519) R71_SFP1.1@5800.5,553.5 ; v1(6018.5,1094) 6018.82,1094.32 IC13.8@6018.82,1125.61 ; v2@6032.95,-1010.5 6035.15,-1012.69 v2@6035.87,-1011.96 ; v2(6035.87,-1011.29) v2@6035.87,-1011.96 ; C136.2@6041.5,-1052.5 6035.87,-1046.87 v2@6035.87,-1011.96 ; IC26.16@6052.06,-973.19 6052.06,-995.77 v2@6035.87,-1011.96 ; IC10.5@6080.35,308.5 6094,294.85 C46.1@6094,240 ; v2(6092.5,210) 6093,210 C73.2@6093,180 C46.1@6093,239 ; IC12.7@6106.5,767.54 6106.5,817 6126,836.5 C65.2@6225.5,836.5 ; v2(6121.5,1230) 6130,1238.5 R39.2@6130,1276 ; v2@6158.15,-1038.19 6161.15,-1041.19 C137.2@6199.65,-1041.19 ; IC14.8@6347.18,-305.61 6347.18,-273.68 v1(6345.5,-272) 6345.5,-223.5 C70.1@6347,-222 6386.5,-222 v1(6387.5,-221) ; IC8.14@6541.5,8 6541.5,54 6563.5,76 C58.2@6610,76 ; 627.39,628.61 C164.1@648.5,607.5 ; 627.39,628.61 C164.1@648.5,607.5 ; 627.39,628.61 C164.1@648.5,607.5 ; C199.1@5116.45,-446 C199.1@5151.45,-411 ; C199.1@5116.45,-446 C199.1@5151.45,-411 ; v1(2246.5,675) 2247.5,674 R9.2@2247.5,636.5 2247.5,675 v1(2246.5,675)
  Top Layer w30: v3(2057.5,1123) v3(2177.5,1123) ; v3@2142.5,1123 2137.7,1118.2 IC22.3@2137.7,1053.55 2244.87,1053.55 C21.1@2246.32,1055
  Bottom Layer w8: 1248.4,768.5 1249.11,769.21 CN11.4@1249.11,825.54 1249.11,887.19 v1(1248.4,887.9) ; v1@1249.11,1070.41 CN11.3@1249.11,1030.26 1249.11,985.29 v1(1249.6,984.8) ; v1(1268.7,868) 1268.8,867.9 CN11.2@1268.8,825.54 1268.8,780.3 v1(1269.6,779.5) ; v1(1269,965.1) 1268.8,965.3 CN11.1@1268.8,1030.26 1268.8,1091.2 v1(1269.5,1091.9) ; IC42.4@1873.26,-465.4 1911.9,-465.4 v1(1912.5,-466) ; C155.2@1955,-526 v1(1994.5,-526) ; IC42.3@1967.74,-465.4 2007.1,-465.4 v1(2007.5,-465) ; v1(2391.5,-51) 2391.5,-65.56 L7.2@2410.94,-85 2426.5,-69.44 v1(2426.5,-51) ; v1(2578.5,-78) C41.1@2602.12,-78 ; v1(2617.5,-335) C189.1@2617.5,-313.72 ; v1(2636.5,-80) 2637.5,-80 v1@2640.5,-83 ; v1@2638.12,-79 C50.1@2656.5,-79 ; C50.1@2658.88,-83 C50.1@2664.5,-77.38 ; v1(2696.5,-78) 2696.88,-78.38 C44.1@2723.5,-78.38 ; C192.1@2734.22,-177 v1(2755.5,-177) ; C43.1@2739.12,-284 2735.22,-280.09 C191.1@2735.22,-235 v1(2756.5,-235) ; v1(4225.5,768) 4237.5,780 C202.2@4242.78,780 ; C197.1@4235.5,629.28 4235.5,625 v1(4254.5,606) ; v1(4266.5,812) 4278.5,824 C194.1@4286.78,824 ; v1(4305.5,463) 4333.5,491 C196.1@4333.5,512.28 ; C195.1@4325.5,893.72 4351.78,893.72 v1(4352.5,893) ; v1(4378.5,899) 4395.22,899 C190.1@4404.5,889.72 ; C193.1@4437.5,826.72 4463.78,826.72 4471.5,819 v1(4471.5,796) v1@4471.5,795 ; C188.1@4499.22,767 4499.5,767 v1(4513.5,753) ; C178.2@4537.22,656 4537.22,674.72 v1(4540.5,678) ; C42.1@4544.12,722 4544.12,718.38 v1(4561.5,701)
  Bottom Layer w12: v2(2655.5,633) 2655.5,672 2668.5,685 2818.5,685 2859.1,644.4 IC41.3@2960.26,644.4 IC41.3@2964.26,644.4 ; C16.2@2817.5,285.5 2833.5,269.5 v1(2833.5,251) ; v1(2859.7,250.6) 2859.7,267.7 C34.2@2877.5,285.5 ; IC41.3@2962.26,646.4 IC41.3@2964.26,644.4 ; IC41.3@2966.26,642.4 IC41.3@2964.26,644.4 ; IC41.4@3054.74,644.4 IC41.3@2964.26,644.4 ; IC41.4@3056.74,646.4 IC41.4@3060.74,642.4 ; IC40.4@4086.26,-176.4 v1@4121.9,-176.4 ; IC40.5@4086.26,-139 v1(4124.5,-139) ; C154.2@4109,-238 4121.9,-225.1 4121.9,-213 v1@4121.9,-176.4 ; v1(4123.5,-178) v1@4121.9,-176.4 ; v2@4193.5,-1094 4193.76,-1093.74 CN1.5@4193.76,-1033.86 4193.76,-965.26 v1(4193.5,-965) ; CN1.6@4193.76,-1238.58 4193.76,-1178.74 v2@4194.5,-1178 ; CN1.8@4225.26,-1238.58 4225.26,-1177.24 v2@4225.5,-1177 ; v2@4225.5,-1097 4225.26,-1096.76 CN1.7@4225.26,-1033.86 4225.26,-965.24 v1(4225.5,-965) ; C72.2@6018,1142 6018,1094.5 v1(6018.5,1094)
  Bottom Layer w20: R16.2@2625.5,350.5 R15.2@2689.5,350.5 ; v2(2651.5,433) C28.2@2692,433 ; v2(2652.5,577) 2688,577 C32.2@2692,573 C24.2@2692,643 ; CN1.6@4193.76,-1238.58 CN1.5@4193.76,-1033.86 ; 4208.32,-1221.65 4208.32,-1076.81 ; CN1.8@4225.26,-1238.58 CN1.7@4225.26,-1033.86
  other v1: 2356.5,372
  other v2: 4194.14,-1174.77 4221.92,-1174.41 4193.97,-1149.11 4221.74,-1148.76 4194.14,-1125.76 4221.92,-1125.41 4194.14,-1100.76 4221.56,-1100.46 6157.15,-1041.19 6552.5,66 6093.5,274 2657.5,351 1786.5,505 6143.5,837
  other v3: 2087.5,1123 2117.5,1123 2147.5,1123
  other v7: 610.5,629
+3V3_OSC: C52.1 C53.1 C54.1 C59.1 C61.1 C63.1 C66.1 C67.1 C68.1 C69.1 C77.1 C79.1 C80.1 C83.1 C86.1 C88.1 C98.1 C106.2 C107.2 C109.1 IC7.1 IC7.11 IC7.12 IC7.24 IC7.27 IC7.30 IC7.31 IC7.32 IC7.38 IC7.41 IC7.49 IC7.50 IC7.51 IC7.54 IC7.57 IC7.60 IC7.61 IC9.2 IC15.1 IC18.1 IC21.4 L5.2 L6.2 L15.2 | length 2316.6
  Top Layer w8: IC9.2@2057.5,-179 v1(2116.5,-179) ; IC7.12@2540.38,-858.9 2572.6,-858.9 v1@2578,-853.5 ; IC7.11@2540.38,-839.21 2563.71,-839.21 v1@2578,-853.5 ; IC7.1@2540.38,-642.36 2570.86,-642.36 v1(2571.5,-643) ; v1(2579.5,-855) v1@2578,-853.5 ; v1(2604.5,-643) 2620.5,-643 2631.92,-631.58 IC7.61@2631.92,-609.88 ; IC7.60@2651.6,-624.1 IC7.60@2651.6,-609.88 2651.6,-635.1 v1(2664.5,-648) ; v1(2694.5,-937) 2710.66,-953.16 IC7.24@2710.66,-970.12 ; IC7.57@2710.66,-609.88 2710.66,-638.16 v1(2721.5,-649) ; v1(2755.5,-939) 2769.71,-953.21 IC7.27@2769.71,-970.12 ; IC7.54@2769.71,-609.88 2769.71,-634.21 v1(2782.5,-647) ; v1(2811.5,-577) 2828.77,-594.27 IC7.51@2828.77,-609.88 ; v1(2812.5,-937) 2828.77,-953.27 IC7.30@2828.77,-970.12 ; IC7.31@2848.45,-970.12 2848.45,-945 v1(2848.5,-940) ; v1(2848.5,-639) IC7.50@2848.45,-609.88 ; v1(2848.5,-940) v1(2848.5,-940) ; v1(2848.5,-639) 2863.5,-639 2868.14,-634.36 IC7.49@2868.14,-609.88 ; IC7.32@2868.14,-970.12 2868.14,-944.64 2864.5,-941 2849.41,-941 v1(2848.5,-940) ; v1(2868.5,-851) 2867.5,-852 2867.5,-850 2878.29,-839.21 IC7.38@2900.62,-839.21 ; v1(2872.5,-780) 2872.66,-780.16 IC7.41@2900.62,-780.16
  Top Layer w12: v1(1779.5,-259) 1779.89,-259.39 IC18.1@1833.18,-259.39 1833.18,-285.17 v1(1845.75,-297.75) C86.1@1875,-327 ; v1(1783.5,-641) 1784.11,-640.39 IC15.1@1838.18,-640.39 1842.5,-644.71 v1(1842.5,-671) 1843.5,-672 C98.1@1843.5,-706.5 ; IC21.4@1981.5,-1004 v3(2036.5,-1004) 2056.5,-1004 C107.2@2082,-1004 ; v3@2004.93,-825.57 C106.2@2004.93,-873 v3@2042.5,-873 ; v1(2241.5,-415) 2241.87,-415 L6.2@2281.87,-455 2270.87,-466 2270.5,-466 2258.5,-478 v1(2258.5,-505) ; v1(2312.5,-33.63) L5.2@2354.87,-76 2359.87,-71 v1(2359.87,-32.37) ; v1(2968.5,-727) 2969.5,-726 C88.1@3005,-726 3005,-693.5 v1(3004.5,-693)
  Top Layer w25: v3(1893.5,-1004) v3(1917.5,-1004) IC21.4@1981.5,-1004 ; v3(2036.5,-1004) 2045.5,-995 v3(2045.5,-979) 2045.5,-964.18 v3(2056.59,-953.09) C109.1@2095.5,-914.18
  Bottom Layer w8: C53.1@2553.5,-676.38 2553.5,-661 v1(2571.5,-643) ; C77.1@2554.88,-890 2554.88,-865.62 2565.5,-855 v1(2579.5,-855) ; C52.1@2592.5,-675.38 2604.5,-663.38 v1(2604.5,-643) ; C69.1@2634.5,-623.38 2639.88,-623.38 v1(2664.5,-648) ; C79.1@2658.5,-952.62 2674.12,-937 v1(2694.5,-937) ; C68.1@2694.5,-623.38 2695.88,-623.38 v1(2721.5,-649) ; C83.1@2724.5,-952.62 2738.12,-939 v1(2755.5,-939) ; C59.1@2750.5,-623.38 2772.88,-623.38 2782.5,-633 v1(2782.5,-647) ; C67.1@2784.5,-949.62 2797.12,-937 v1(2812.5,-937) ; v1(2811.5,-577) 2812.5,-578 C66.1@2812.5,-620.38 ; C63.1@2841.5,-918.62 2841.5,-933 v1(2848.5,-940) ; v1(2848.5,-639) 2850.5,-641 C61.1@2850.5,-662.38 ; v1(2868.5,-851) 2868.5,-839.62 C80.1@2888.12,-820 ; v1(2872.5,-780) 2872.5,-760.62 C54.1@2886.12,-747
  Bottom Layer w12: v1(2374.5,-655) 2391.94,-655 L15.2@2411.94,-635 2387.5,-610.56 v1(2387.5,-610)
  other v3: 2043.5,-873 2004.5,-825
+5V: C108.2 C119.1 C125.1 IC17.2 IC21.1 IC21.2 L16.2 R62.2 | length 6353.2
  Top Layer w12: C108.2@1441.5,-383.5 1442,-383 1477.5,-383 IC17.2@1544.04,-383 v1(1612.5,-383)
  Top Layer w20: v3(1891.5,-1104) v3(1915.5,-1104) IC21.2@1981.5,-1104 v3(2045.5,-1104) ; IC21.1@1981.5,-1154 v3(2044.5,-1154) ; v2(5252.74,-1070.64) 5311.77,-1070.64 C119.1@5313.41,-1069 C119.1@5293.46,-1049.04 ; v2(5252.74,-1040.64) 5285.06,-1040.64 C119.1@5293.46,-1049.04 ; v2(5252.74,-980.64) 5267.77,-980.64 C125.1@5297.77,-950.64 ; v2(5252.74,-950.64) C125.1@5297.77,-950.64 ; v2(5252.74,-920.64) 5303.06,-920.64 C125.1@5315.41,-933 C125.1@5297.77,-950.64 ; v2@5255.06,-1010.64 v2(5252.74,-1010.64) 5273.14,-1010.64 5293.46,-1030.96 C119.1@5293.46,-1049.04
  Top Layer w30: C108.2@1441.5,-383.5 1441.5,-1023 1606.5,-1188 1862.5,-1188 1897.5,-1153 v3(1898.5,-1153) v3(1924.5,-1153) 1980.5,-1153 IC21.1@1981.5,-1154
  Top Layer w40: C119.1@5313.41,-1069 5315.41,-1067 5315.41,-821.09 5326.3,-810.2 L16.2@5370.5,-810.2
  MidLayer2 w50: v3(1898.5,-1153) v3(1924.5,-1153) v3@2044.5,-1153 ; 1902.5,-1110 1908.5,-1104 v3(1915.5,-1104) v3(2045.5,-1104) 2044.5,-1105 v3@2044.5,-1153 ; v3(2044.5,-1154) v3@2044.5,-1153 ; 5103.14,-1229.36 5087.5,-1245 ; v2@5252.5,-920 5252.5,-1080 5087.5,-1245 ; v3@2044.5,-1153 2065.5,-1153 2272.8,-1360.3 4972.2,-1360.3 5087.5,-1245
  Bottom Layer w20: v2(5252.74,-1070.64) 5253.1,-1071 R62.2@5314,-1071
+12V_BULK: C116.2 CN1.1 CN1.2 CN1.3 CN1.4 IC19.7 | length 3341
  Top Layer w24: IC19.7@5781.96,-926 5846.44,-926 C116.2@5871.5,-900.94 5924.33,-900.94 v2(5933.14,-909.76)
  MidLayer2 w12: v1(4132.5,-970) 4132.5,-1040 4135.5,-1043 4152.26,-1059.76 ; 4145.5,-1033 4162.5,-1016 v1(4162.5,-970)
  MidLayer2 w20: v1(4130.77,-1180) 4142.83,-1167.94 ; v1@4136.63,-1174.13 4142.83,-1167.94 ; v1(4162.26,-1180) 4162.26,-1148.5 ; 4142.83,-1167.94 4142.83,-1118.99 ; 4142.83,-1167.94 4162.26,-1148.5 ; 4142.83,-1118.99 4142.83,-1069.2 4152.26,-1059.76 4162.26,-1049.76 ; 4142.83,-1118.99 4130.77,-1106.93 v1(4130.77,-1090.27) 4130.77,-1047.73 4135.5,-1043 4145.5,-1033 4162.26,-1049.76 ; 4142.83,-1118.99 4162.26,-1138.43 ; 4162.26,-1148.5 4162.26,-1138.43 ; 4162.26,-1138.43 v1(4162.26,-1090) 4162.26,-1049.76
  MidLayer2 w50: 4145.5,-1033 4749.5,-1033 4962.5,-820 5840.5,-820 5931.7,-911.2 5933.14,-912.64 v2(5933.14,-939.76) v2(5933.14,-969.76)
  Bottom Layer w12: CN1.2@4130.77,-1238.58 v1(4130.77,-1180) 4130.77,-1170.73 4141.5,-1160 4141.5,-1101 v1(4130.77,-1090.27) CN1.1@4130.77,-1033.86 4130.77,-971.73 v1(4132.5,-970) ; CN1.4@4162.26,-1238.58 v1(4162.26,-1180) v1(4162.26,-1090) CN1.3@4162.26,-1033.86 4162.26,-970.24 v1(4162.5,-970)
  Bottom Layer w20: CN1.2@4130.77,-1238.58 CN1.4@4162.26,-1238.58
CLKB_CPUPIN0: CN1.46 IC7.21 | length 2728.5
  Top Layer w5: v1@2603.5,-1123 v1(2606.5,-1126) 2606.5,-1039 2651.6,-993.9 IC7.21@2651.6,-970.12
  MidLayer1 w6: v1(2606.5,-1126) 2606.5,-1195 2678.9,-1267.4 3111.67,-1267.4 3141.37,-1297.1 4735.54,-1297.1 4823.5,-1209.14 4823.5,-1161 v1(4823.5,-1164.7)
  Bottom Layer w5: v1(4823.5,-1164.7) 4823.5,-1161 4823.68,-1161.18 CN1.46@4823.68,-1238.58 4823.68,-1186.82
CLKB_CPUPIN1: CN1.48 IC7.16 | length 2817.7
  Top Layer w5: IC7.16@2540.38,-937.64 2540.38,-1025.88 2565.5,-1051 v1(2565.5,-1129)
  MidLayer1 w5: v1(2565.5,-1129) 2565.5,-1210 2645,-1289.5
  MidLayer1 w6: 2645,-1289.5 2646.9,-1291.4 3101.73,-1291.4 3131.43,-1321.1 4776.4,-1321.1 4864.5,-1233 v1(4864.5,-1161)
  Bottom Layer w5: CN1.48@4855.18,-1238.58 4855.18,-1185.32 4864.5,-1176 v1(4864.5,-1161)
CLKB_CPUPIN3: CN1.47 IC7.17 | length 2759.8
  Top Layer w5: IC7.17@2572.86,-970.12 2572.86,-1027.36 2578.5,-1033 2578.5,-1102 2587.5,-1111 v1(2587.5,-1150)
  MidLayer1 w5: v1(2587.5,-1150) 2587.5,-1205 2660.5,-1278 ; v1@4851.18,-1101.68 v1(4855.18,-1097.68)
  MidLayer1 w6: 2660.5,-1278 2661.9,-1279.4 3106.7,-1279.4 3136.4,-1309.1 4740.51,-1309.1 4843.5,-1206.11 4843.5,-1109.35 v1@4851.18,-1101.68
  Bottom Layer w5: v1(4855.18,-1097.68) CN1.47@4855.18,-1033.86
CLKB_CPUPIN4: CN1.39 IC7.7 | length 4118.9
  Top Layer w8: IC7.7@2540.38,-760.47 2565.97,-760.47 v1(2579.5,-774)
  MidLayer1 w6: v1(2579.5,-774) 2579.5,-828.13 2604.02,-852.65 2604.02,-893.6 2628.42,-918 2702.37,-918 2724.5,-940.13 2724.5,-1183.5 2772.4,-1231.4 3131.9,-1231.4 3152,-1251.5 ; 4390.5,-1249.5 4388.5,-1251.5 3152,-1251.5 ; v1(4790.2,-1116) 4779.5,-1126.7 4779.5,-1193.7 4713.6,-1259.6 3160.1,-1259.6 3152,-1251.5
  Bottom Layer w6: CN1.39@4729.19,-1033.86 4729.19,-1086.69 4758.5,-1116 v1(4790.2,-1116)
CLKB_CPUPIN5: CN1.40 IC7.22 | length 2737.1
  Top Layer w5: v1(2626.5,-1149) 2626.5,-1040 2671.29,-995.21 IC7.22@2671.29,-970.12
  MidLayer1 w6: v1(2626.5,-1149) 2626.5,-1190 2691.9,-1255.4 3116.64,-1255.4 3146.34,-1285.1 4730.57,-1285.1 4804.5,-1211.17 4804.5,-1156.8 v1(4822.6,-1138.7)
  Bottom Layer w6: CN1.40@4729.19,-1238.58 4729.19,-1177.31 4738.5,-1168 4789.2,-1168 4818.5,-1138.7 v1(4822.6,-1138.7)
CMI_CLKSRC0: CN13.19 IC5.119 | length 1516.5
  Top Layer w6: IC5.119@3425.85,459.36 3537.14,459.36 3550.5,446 v1(3550.5,414)
  MidLayer1 w6: v1(3458.5,-126) 3458.5,42.87 3550.5,134.87 v1(3550.5,414)
  Bottom Layer w6: v1(3458.5,-126) 3458.5,-299.85 3494.07,-335.43 ; 3491.5,-332.85 3494.07,-335.43 ; CN13.19@3897.3,-629.13 3897.3,-588.93 3779.37,-471 3629.65,-471 3494.07,-335.43
CMI_CLKSRC1: CN13.17 IC5.115 | length 1438.1
  Top Layer w6: IC5.115@3425.85,380.62 3489.12,380.62 v1(3518.5,410)
  MidLayer1 w6: v1(3438.5,-103) 3438.5,51 3518.5,131 v1(3518.5,410)
  Bottom Layer w6: v1(3438.5,-103) 3439.5,-104 3439.5,-297.82 3483.09,-341.41 ; 3479.5,-337.82 3483.09,-341.41 ; CN13.17@3865.81,-629.13 3865.81,-589.31 3829.5,-553 3782.47,-553 3729.47,-500 3641.68,-500 3483.09,-341.41
CMI_IRQ0: CN13.23 IC5.121 | length 1630.6
  Top Layer w6: IC5.121@3425.85,498.73 3558.77,498.73 3589.5,468 v1(3589.5,413)
  MidLayer1 w6: v1(3497.5,-126) 3497.5,22 3588.5,113 3588.5,410 3591.5,413 v1(3589.5,413)
  Bottom Layer w6: v1@3498.5,-126 v1(3497.5,-126) 3498.5,-127 3498.5,-305.91 3639.59,-447 3789.31,-447 3894.31,-552 3944.5,-552 3960.3,-567.8 CN13.23@3960.3,-629.13 ; CN13.23@3954.99,-623.82 CN13.23@3959.5,-628.34
CMI_IRQ1: CN13.21 IC5.120 | length 1566.3
  Top Layer w6: IC5.120@3425.85,479.05 3551.48,479.05 3569.5,461.03 v1(3569.5,438)
  MidLayer1 w6: v1(3478.5,-102) 3478.5,32 3569.5,123 v1(3569.5,438)
  Bottom Layer w6: v1(3478.5,-102) 3478.5,-302.88 3506.06,-330.44 ; 3503.5,-327.88 3506.06,-330.44 ; CN13.21@3928.8,-629.13 3928.8,-587.3 3905.5,-564 3889.34,-564 3784.34,-459 3634.62,-459 3506.06,-330.44
CMI_PIO0: CN13.13 IC5.110 | length 1218.4
  Top Layer w6: v1@3419.5,-124 v1(3420.5,-125) ; IC5.110@3425.85,282.2 3474.3,282.2 ; 3474.5,282 3474.3,282.2 ; v1(3494.5,282) 3494.3,282.2 3474.3,282.2
  MidLayer1 w6: v1(3420.5,-125) 3419.5,-124 3419.5,55 3494.5,130 v1@3494.5,279
  Bottom Layer w6: v1@3421.5,-126 3421.5,-296.79 3637.6,-512.89 3725.39,-512.89 3802.81,-590.31 CN13.13@3802.81,-629.13
CMI_PIO1: CN13.11 IC5.106 | length 1083.9
  Top Layer w6: 3315.5,147.21 3315.5,144 ; IC5.106@3315.62,191.65 3315.5,191.53 3315.5,144 ; v1(3400.5,-102) 3400.5,-79 3315.5,6 3315.5,144
  Bottom Layer w6: v1(3400.5,-102) 3400.5,-292.76 3488.62,-380.88 ; 3468.62,-360.88 3488.62,-380.88 ; CN13.11@3771.32,-629.13 3771.32,-590.82 3705.39,-524.89 3632.63,-524.89 3531.74,-424 3531.5,-424 3531.5,-423.76 3488.62,-380.88
CMI_PIO2: CN13.9 IC5.105 | length 1089.6
  Top Layer w6: IC5.105@3295.93,191.65 3296.5,191.08 3296.5,138 ; 3296.5,147.21 3296.5,138 ; v1(3380.5,-124) 3380.5,-77 3296.5,7 3296.5,138
  Bottom Layer w6: v1(3380.5,-124) 3380.5,-360.87 3556.52,-536.89 3685.9,-536.89 3726.25,-577.25 3739.82,-590.82 CN13.9@3739.82,-629.13
CMI_PIO3: CN13.7 IC5.104 | length 1078.2
  Top Layer w6: IC5.104@3276.25,191.65 3276.5,191.39 3276.5,136 ; 3276.5,147.21 3276.5,136 ; v1(3357.5,-101) 3357.5,-71 3276.5,10 3276.5,136
  Bottom Layer w6: v1(3357.5,-101) 3357.5,-354.84 3551.55,-548.89 3666.4,-548.89 3708.33,-590.82 CN13.7@3708.33,-629.13
CMI_SPI_CS: CN13.27 IC5.124 | length 1716.9
  Top Layer w6: IC5.124@3425.85,557.79 3521.71,557.79 3608.5,471 v1(3608.5,436)
  MidLayer1 w6: v1(3516.5,-103) 3516.5,11 3608.5,103 3608.5,303.88 3608.5,307 v1(3608.5,436)
  Bottom Layer w6: v1(3516.5,-103) 3516.5,-306.94 3644.56,-435 3794.28,-435 3899.28,-540 3971.5,-540 ; 3969.5,-540 3971.5,-540 ; CN13.27@4023.29,-629.13 4022.5,-628.35 4022.5,-560 4002.5,-540 3971.5,-540
CMI_SPI_SCLK: CN13.33 IC5.127 | length 1847.8
  Top Layer w6: IC5.127@3425.85,616.84 3525.5,616.84 3669.5,472.84 v1(3669.5,415)
  MidLayer1 w6: v1(3574.5,-127) 3575.5,-126 3575.5,-22 3661.51,64.01 3661.51,305.99 3669.5,313.97 v1(3669.5,415)
  Bottom Layer w6: v1(3574.5,-127) 3574.5,-310 3663,-398.5 3808.69,-398.5 3914.19,-504 4025.44,-504 4059.47,-538.03 4091.53,-538.03 4117.78,-564.28 CN13.33@4117.78,-629.13 CN13.33@4111.49,-622.84
CMI_SPI_SDIN: CN13.31 IC5.126 | length 1796
  Top Layer w6: IC5.126@3425.85,597.16 3524.34,597.16 3648.5,473 v1(3648.5,434)
  MidLayer1 w6: v1(3556.5,-104) 3556.5,-12.03 3648.5,79.97 3648.5,309.94 v1(3648.5,434)
  Bottom Layer w6: v1(3556.5,-104) 3555.5,-104 3555.5,-312 3654.5,-411 3804.22,-411 3909.22,-516 4020.47,-516 4059.47,-555 4070.5,-555 4086.28,-570.78 CN13.31@4086.28,-629.13 CN13.31@4085.19,-628.05
CMI_SPI_SDOUT: CN13.29 IC5.125 | length 1752
  Top Layer w6: IC5.125@3425.85,577.47 3521.03,577.47 3627.5,471 v1(3627.5,415)
  MidLayer1 w6: v1(3535.5,-126) 3535.5,0 3627.5,92 3627.5,100 v1(3627.5,415)
  Bottom Layer w6: v1(3535.5,-126) 3535.5,-308.97 3649.53,-423 3799.25,-423 3904.25,-528 4015.5,-528 4054.78,-567.28 CN13.29@4054.78,-629.13
CY2_U0: IC16_U0.7
CY2_U1: IC16_U1.5
CY3_U0: CT7_U0.1 IC16_U0.3 | length 227.5
  Top Layer w8: IC16_U0.3@4459.18,-471.2 4503.7,-471.2 v1(4504.5,-472)
  Bottom Layer w8: v1(4504.5,-472) 4618.59,-472 CT7_U0.1@4666.51,-519.91
CY3_U1: CT7_U1.1 IC16_U1.8 | length 555.8
  Top Layer w8: IC16_U1.8@3719.82,-539.39 3719.82,-564.32 3736.5,-581 3981.22,-581 3983.22,-583 4054.5,-583 4112.5,-525 4112.5,-489 v1(4095.5,-472)
  Bottom Layer w8: CT7_U1.1@4052.41,-463.99 4060.42,-472 v1(4095.5,-472)
DAC_DMTD_DIN: IC5.71 IC18.7 | length 1281.7
  Top Layer w6: IC18.7@1667.82,-233.8 1715.7,-233.8 1740.5,-209 v1(1740.5,-115) ; v1@2543.7,281.2 IC5.71@2595.15,281.2
  MidLayer1 w6: v1(1740.5,-115) 1740.5,14 1810.5,84 2272.5,84 2372.5,184 2372.5,186.87 2465.63,280 2515.5,280 ; 2524.5,280 2515.5,280 ; v1(2543.5,281) 2542.5,280 2515.5,280
DAC_DMTD_SCLK: IC5.70 IC18.6 | length 1274.7
  Top Layer w6: IC18.6@1667.82,-208.2 1712.3,-208.2 1720.5,-200 v1(1720.5,-135) ; v1(2519.5,301) 2520.5,300 2594.26,300 IC5.70@2595.15,300.88
  MidLayer1 w6: v1(1720.5,-135) 1720.5,23 1797.5,100 2264.5,100 2465.5,301 2493.5,301 ; 2498.5,301 2493.5,301 ; v1(2519.5,301) 2493.5,301
DAC_DMTD_SYNC: IC5.69 IC18.5 | length 1245.3
  Top Layer w6: v1(1667.5,-136) 1668.5,-137 1667.82,-137.68 IC18.5@1667.82,-182.61 ; v1@2544.07,320.57 IC5.69@2595.15,320.57
  MidLayer1 w6: v1(1667.5,-136) 1667.5,5 1779.5,117 2251.5,117 2454.5,320 2509.5,320 2541.5,320 v1(2542.5,319)
DAC_REF_DIN: IC5.66 IC15.7 | length 1945.1
  Top Layer w6: v1(1625.5,-614) 1672.03,-614 IC15.7@1672.82,-614.8 ; v1(2519.5,380) 2594.77,380 IC5.66@2595.15,379.62
  MidLayer1 w6: v1(1625.5,-614) 1596.5,-614 1553.5,-571 1553.5,-251 1603.5,-201 1603.5,34 1741.5,172 2235.5,172 2444.5,381 2454.5,381 ; 2500.5,381 2454.5,381 ; v1(2519.5,380) 2518.5,381 2454.5,381
DAC_REF_SCLK: IC5.67 IC15.6 | length 1920.5
  Top Layer w6: IC15.6@1672.82,-589.2 1722.3,-589.2 v1(1722.5,-589) ; v1@2540.56,359.94 IC5.67@2595.15,359.94
  MidLayer1 w6: v1(1722.5,-589) 1617.5,-589 1571.5,-543 1571.5,-259 1621.5,-209 1621.5,23 1749.5,151 2236.5,151 2446.5,361 2539.5,361 v1(2540.5,360)
DAC_REF_SYNC: IC5.68 IC15.5 | length 1749.6
  Top Layer w6: v1(1625.5,-564) 1625.89,-563.61 IC15.5@1672.82,-563.61 ; v1(2519.5,340) 2519.75,340.25 IC5.68@2595.15,340.25
  MidLayer1 w6: v1(1625.5,-564) 1591.5,-530 1591.5,-262.13 1638.5,-215.13 1638.5,12 1761.5,135 2245.5,135 2450.5,340 2516.5,340 v1(2519.5,340)
DMTDCLK_FAN_N: C2.1 IC6.5 | length 1199.1
  Top Layer w8: IC6.5@2617.52,-107.75 2616.5,-106.73 2616.5,-53 v1(2621.5,-48)
  Bottom Layer w8: v1(1578.2,135) 1580.1,135 1674.1,41 2562.8,41 2615,-11.2 2615,-41.5 v1(2621.5,-48)
DMTDCLK_FAN_P: C1.1 IC6.6 | length 1164.2
  Top Layer w8: v1(2594.5,-49) 2598.5,-53 2598.5,-107.08 IC6.6@2597.83,-107.75
  Bottom Layer w8: v1(1577.7,93) 1602.3,93 1668.3,27 1702.5,27 2557,27 2601,-17 2601,-42.5 v1(2594.5,-49)
DMTDCLK_FB_N: IC5.25 IC6.2 R18.1 | length 1810.3
  Top Layer w8: v1(2495.5,239) 2489.5,233 2489.5,195.8 2673.73,11.57 2673.73,-85.16 2676.57,-88 IC6.2@2676.57,-107.75 ; R18.1@2840,1112 2882.55,1069.46 IC5.25@2882.55,1022.35
  Bottom Layer w8: v1(2495.5,239) 2489.5,245 2489.5,1073 2540.5,1124 2834.01,1124 2882.26,1075.76 v1(2882.26,1069.76)
DMTDCLK_FB_P: IC5.24 IC6.3 R18.2 | length 1830.3
  Top Layer w8: v1(2469.5,239) 2475.5,233 2475.5,190 2659.73,5.77 2659.73,-85.16 2656.89,-88 IC6.3@2656.89,-107.75 ; IC5.24@2902.26,1022.38 2902.26,1078.04 2902.23,1111.24 R18.2@2903,1112
  Bottom Layer w8: v1(2469.5,239) 2475.5,245 2475.5,1078.8 2534.7,1138 2842.3,1138 2893.4,1086.9 2899.4,1086.9 v1(2900.64,1088.14)